# Altium PCB Arduino_Pro_Micro_PCB.PcbDoc
Units mil, origin at the board's own origin, x right, y up, seen from the top; angles counter-clockwise.
Board outline 1181.1 x 1574.8 mil, 2 copper layers (Top Layer, Bottom Layer); 19 components, 30 nets, 108 pads, 24 vias.
Unrouted connection lines stored in the file: 1.
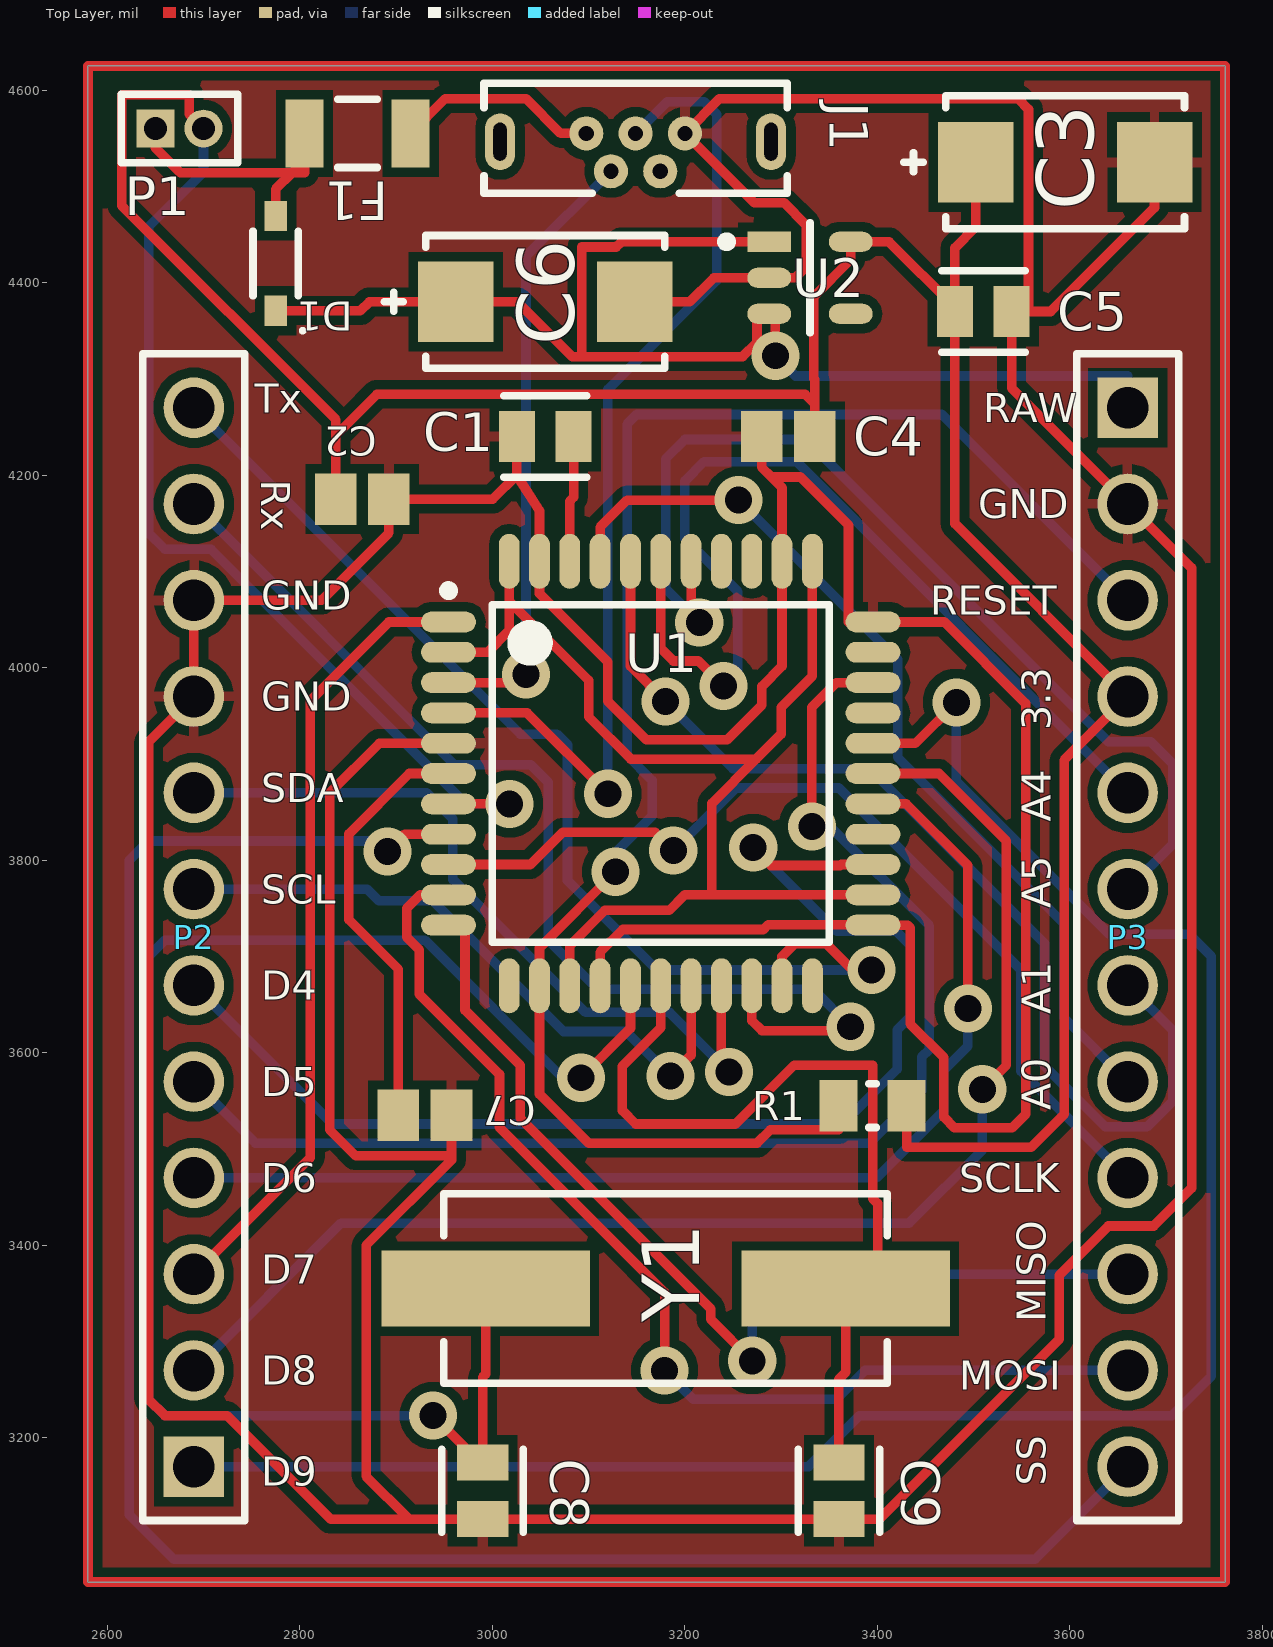
[diagram p0: Top Layer view]
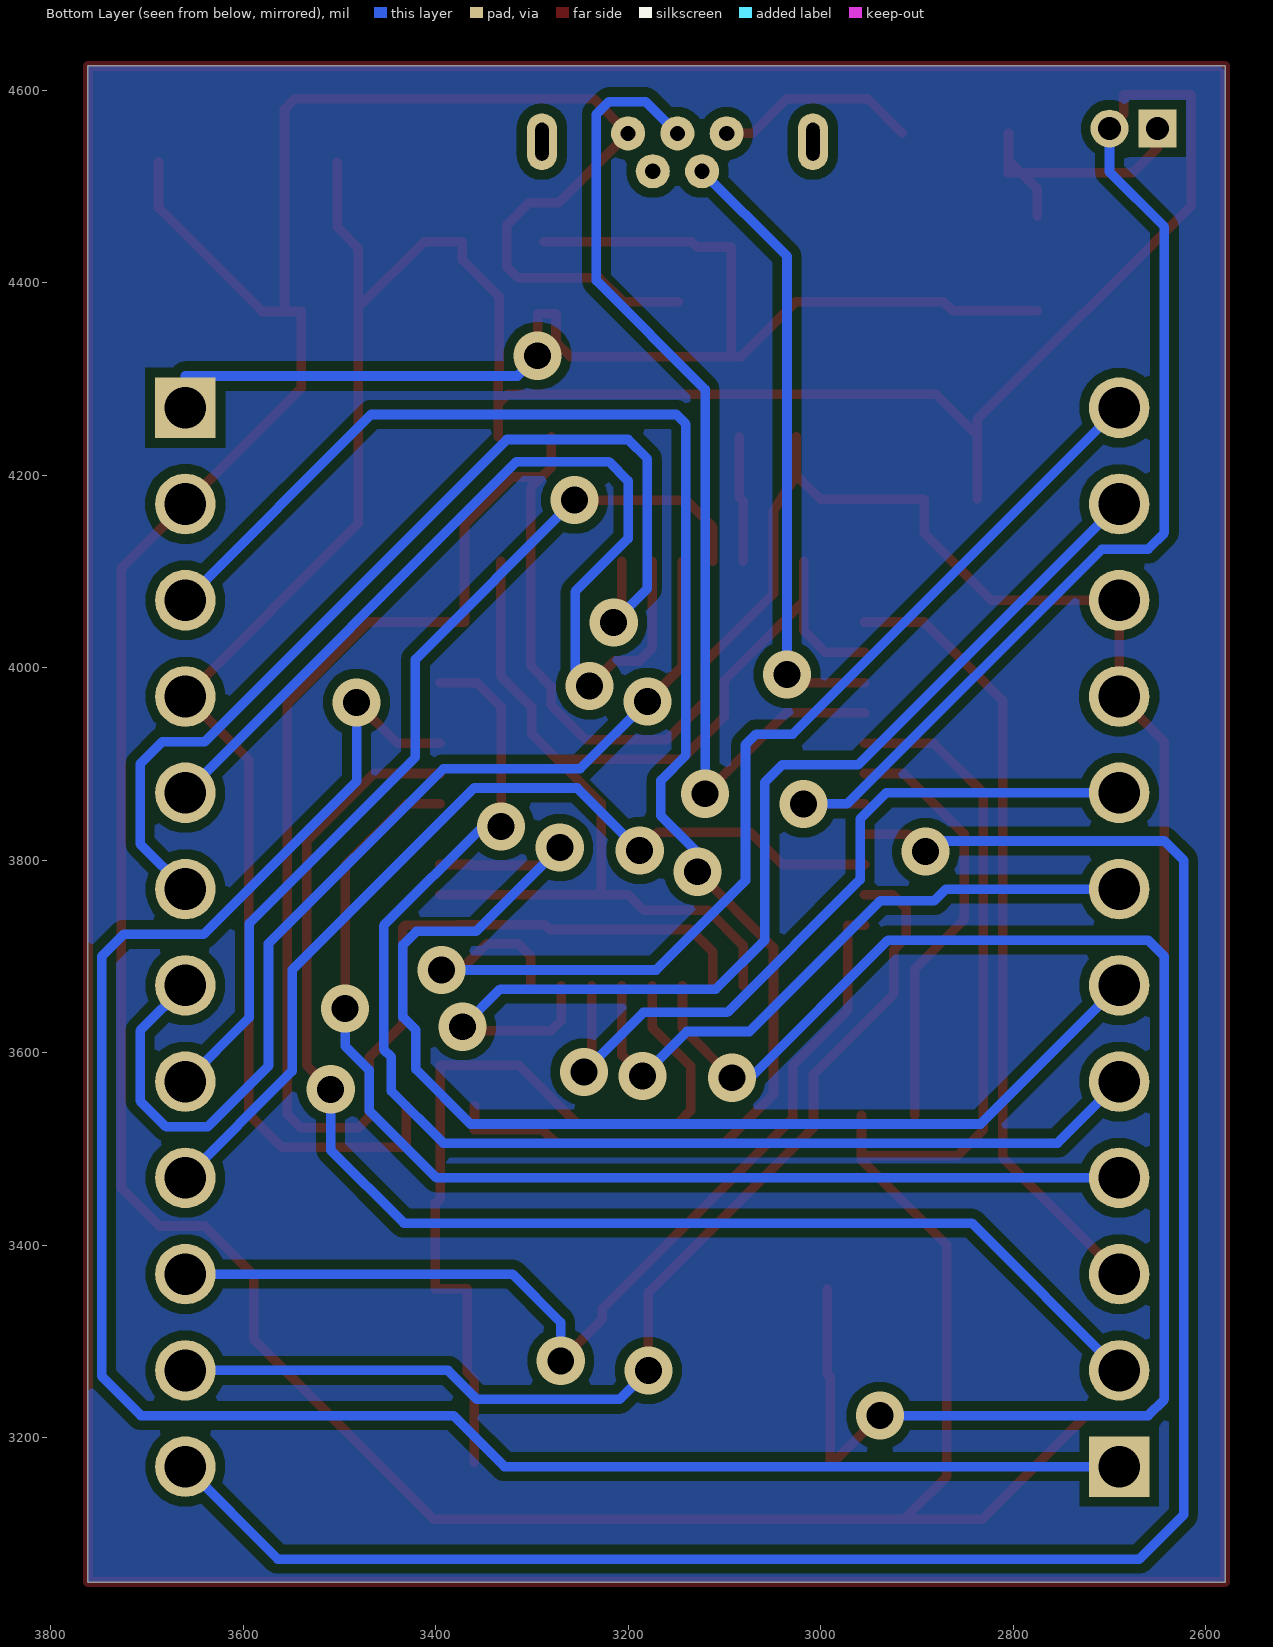
[diagram p1: Bottom Layer view, seen from below]
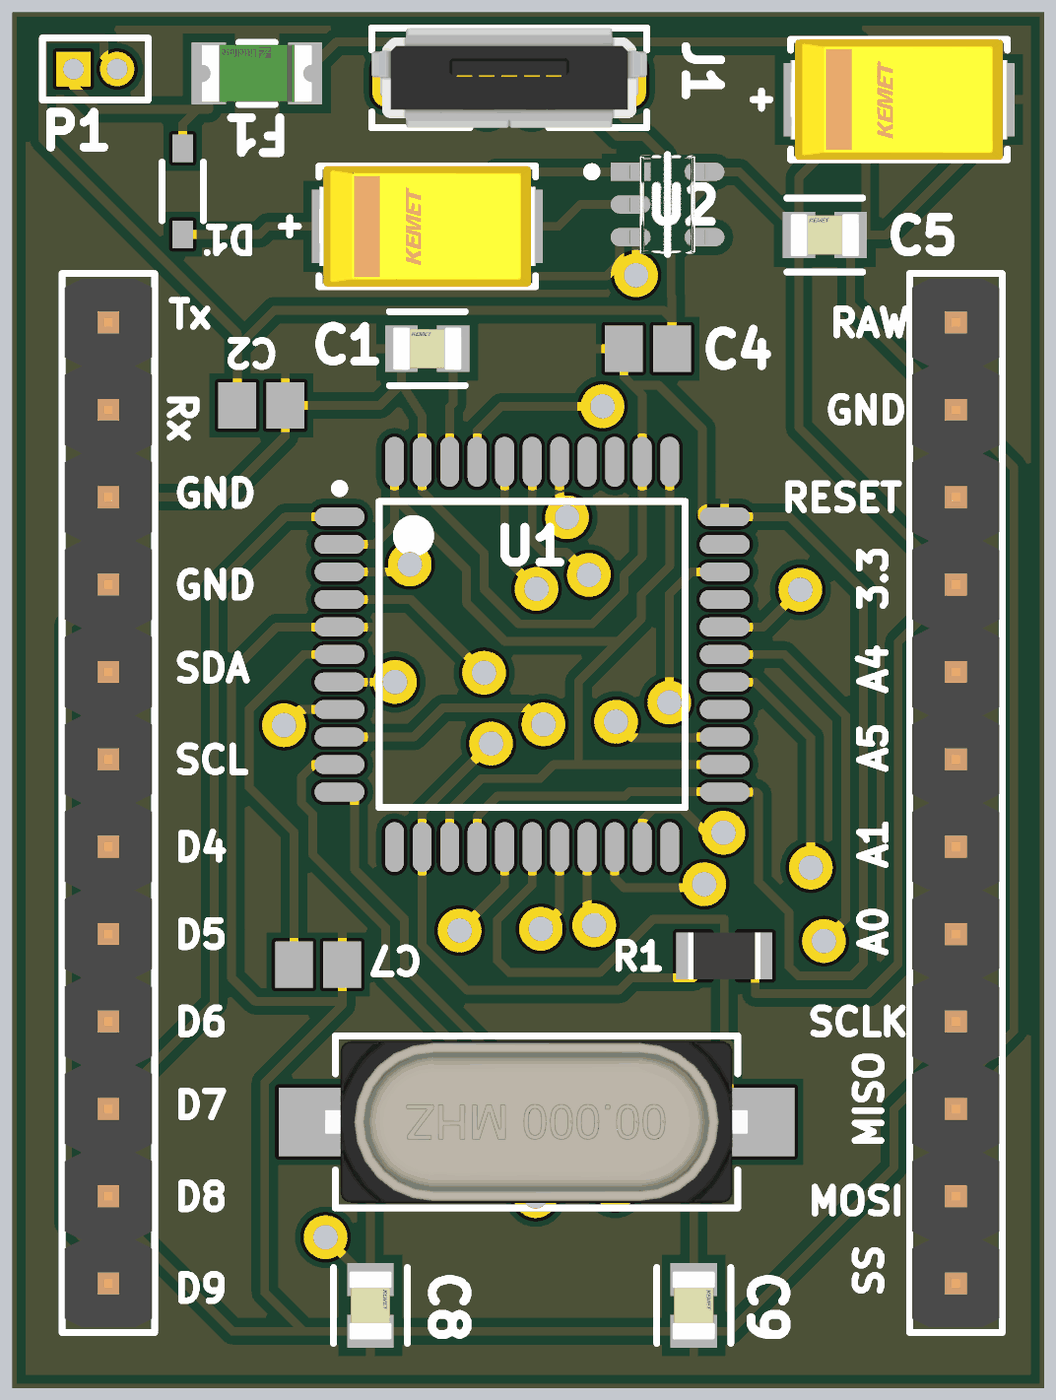
[diagram p2: 3D render of the assembled board from above, using the file's embedded part models]

## Layer stack, top to bottom
Top Solder: solder mask 0.4, Solder Resist, Dk 3.5
Top Layer: signal copper 1.4
Dielectric 1: dielectric 12.6, FR-4, Dk 4.8
Bottom Layer: signal copper 1.4
Bottom Solder: solder mask 0.4, Solder Resist, Dk 3.5

## Board outline
2580,3050.2 2580,4625 3761.1,4625 3761.1,3050.2

## Design rules (kind name [scope] priority, off if disabled: settings)
Clearance [All] p1: gap=10 ignorepadtopadclearanceinfootprint=FALSE except(0: Arc-Hole Track-Hole SMDPad-Hole THPad-Hole Via-Hole Fill-Hole Poly-Hole Region-Hole Text-Hole)
PolygonConnect [All] p1: connectstyle=Relief reliefconductorwidth=10 reliefentries=4 polygonreliefangle="90 Angle" airgapwidth=10
RoomDefinition Arduino_Pro_Micro_SCH [InComponentClass('Arduino_Pro_Micro_SCH')] p1: confinementstyle=ConfineIn formatcopy=TRUE lockcomponents=FALSE outline 7130,1080 10685,1080 10685,2205 7130,2205
RoutingVias [All] p1: holewidth=28 width=50 viastyle="Through Hole" minholewidth=28 minwidth=50 maxholewidth=28 maxwidth=50
SolderMaskExpansion [All] p1: expansion=4 istentingtop=FALSE
Width [All] p1: maxlimit=10 minlimit=10 preferedwidth=10
30 further rules are at their usual default settings.

## Components (designator, comment, footprint, x,y, rotation, side; value= is the part's Value field where it differs from the comment)
C1 "0.1uF 16V" FP-C0805C-DN-MFG 3055,4240 r0 top value="0.10 μF"
C2 "1uF 16V" CAPC2013X145X50LL20T25 2865,4175 r180 top
C3 "10uF 16V" FP-T491C106K016AT-MFG 3595,4525 r180 top
C4 "1uF 16V" CAPC2013X145X50LL20T25 3307.43,4240 r0 top
C5 "0.1uF 16V" FP-C0805C-DN-MFG 3510,4370 r0 top value="0.10 μF"
C6 "10uF 16V" FP-T491C106K016AT-MFG 3055,4380 r180 top
C7 "1uF 16V" CAPC2013X145X50LL20T25 2930,3535 r180 top
C8 "22pF" FP-C0805C-DN-MFG 2990,3145 r270 top value="22 pF"
C9 "22pF" FP-C0805C-DN-MFG 3360,3145 r270 top value="22 pF"
D1 "BAT165" INF-SOD323_V 2775,4420 r180 top
F1 "6V 500mA" FP-1206L050YR-MFG 2860,4555 r180 top
J1 "614105150621" 614105150621 3148.82,4546.34 r0 top
P1 "MHDR1X2" MHDR1X2 2650,4560 r0 top
P2 "61301211121" 61301211121 2690,3720 r90 top
P3 "61301211121" 61301211121 3660,3720 r270 top
R1 "10K" RESC2013X60X35NL10T20 3395,3545 r0 top
U1 "ATmega32U4-AU" 44ML_L 3175,3890 r0 top
U2 "MIC5219" FP-SOT23-5LD-PL-1-IPC_C 3330,4405 r0 top
Y1 "16Mhz" FOX-HC49SDLF_V 3180,3355 r180 top

## Footprints (in the part's own frame and the unit in brackets; to place one, negate y for a bottom-side part, rotate by r counter-clockwise, add the part's x,y. Pads: shape width x height; smd on the part's side, far side on the other; paste and mask are expansions set on the pad)
44ML_L [mm] "Thin QFP, 44-Leads, Body 10x10mm, Pitch 0.8mm, IPC High Density"
  oval 1.45x0.55 smd: 1(-5.6,4) 2(-5.6,3.2) 3(-5.6,2.4) 4(-5.6,1.6) 5(-5.6,0.8) 6(-5.6,0) 7(-5.6,-0.8) 8(-5.6,-1.6) 9(-5.6,-2.4) 10(-5.6,-3.2) 11(-5.6,-4) 23(5.6,-4) 24(5.6,-3.2) 25(5.6,-2.4) 26(5.6,-1.6) 27(5.6,-0.8) 28(5.6,0) 29(5.6,0.8) 30(5.6,1.6) 31(5.6,2.4) 32(5.6,3.2) 33(5.6,4)
  oval 0.55x1.45 smd: 12(-4,-5.6) 13(-3.2,-5.6) 14(-2.4,-5.6) 15(-1.6,-5.6) 16(-0.8,-5.6) 17(0,-5.6) 18(0.8,-5.6) 19(1.6,-5.6) 20(2.4,-5.6) 21(3.2,-5.6) 22(4,-5.6) 34(4,5.6) 35(3.2,5.6) 36(2.4,5.6) 37(1.6,5.6) 38(0.8,5.6) 39(0,5.6) 40(-0.8,5.6) 41(-1.6,5.6) 42(-2.4,5.6) 43(-3.2,5.6) 44(-4,5.6)
  silkscreen extent -5.72,-4.45 4.45,4.95, body extent -5,-5 5,5, height 1.2
61301211121 [mm] "Pin Header, pitch 2.54 mm, THT, Vertical, single row, 12p"
  rect 1.6x1.6 hole 1.1: 1(-13.97,0)
  round 1.6 hole 1.1: 2(-11.43,0) 3(-8.89,0) 4(-6.35,0) 5(-3.81,0) 6(-1.27,0) 7(1.27,0) 8(3.81,0) 9(6.35,0) 10(8.89,0) 11(11.43,0) 12(13.97,0)
  silkscreen extent -15.39,-1.34 15.39,1.34, body extent -15.24,-1.27 15.24,1.27, height 8.57
614105150621 [mm] "Micro USB 2.0 Type AB Vertical 5 Contacts"
  round 0.9 hole 0.4: 1(-1.3,0.22) 2(-0.65,-0.78) 3(0,0.22) 4(0.65,-0.78) 5(1.3,0.22)
  oval 0.8x1.5 hole 0.35 slot 1 at 90 deg: Shell(-3.575,0) Shell(3.575,0)
  silkscreen extent -4,-1.36 4,1.54, body extent -4,-1.36 4,1.54, height 5.66
CAPC2013X145X50LL20T25 [mm] "Chip Capacitor, 2-Leads, Body 2.00x1.25mm, IPC High Density"
  rect 1.1x1.35 smd: 1(-0.7,0) 2(0.7,0)
  body extent -1.1,-0.72 1.1,0.72, height 1.45
FOX-HC49SDLF_V [mm] "SMD, 2-Leads, Body 5x11.7mm"
  rect 5.5x2 smd: 1(-4.75,0) 2(4.75,0)
  silkscreen extent -5.85,-2.5 5.85,2.5, body extent -6.15,-2.35 6.15,2.35, height 4.34
FP-1206L050YR-MFG [mm]
  rect 1x1.8 smd paste+0 mask+0: 1(-1.4,0) 2(1.4,0)
  silkscreen extent -0.53,-0.9 0.53,0.9, body extent -2,-1 2,1, height 0.25
FP-C0805C-DN-MFG [mm]
  rect 0.95x1.35 smd paste+0 mask+0: 1(-0.75,0) 2(0.75,0)
  silkscreen extent -1.1,-1.07 1.1,1.07, body extent -1.4,-0.85 1.4,0.85, height 0.25
FP-SOT23-5LD-PL-1-IPC_C [mm]
  rect 1.156x0.53 smd paste+0 mask+0: 1(-1.075,0.95)
  rrect100% 1.156x0.53 smd paste+0 mask+0: 2(-1.075,0) 3(-1.075,-0.95) 4(1.075,-0.95) 5(1.075,0.95)
  silkscreen extent -2.33,-1.45 0,1.45, body extent -1.75,-1.55 1.75,1.55, height 0.25
FP-T491C106K016AT-MFG [mm]
  rect 1.99x2.13 smd paste+0 mask+0: 1(-2.36,0) 2(2.36,0)
  silkscreen extent -3.15,-1.75 4.25,1.75, body extent -3.48,-1.87 3.48,1.87, height 0.25
INF-SOD323_V [mm] "SOD, 2-Leads, Body 1.7x1.25 mm"
  rect 0.6x0.8 smd: 1(0,1.25) 2(0,-1.25)
  silkscreen extent -0.76,-0.85 0.6,1.83, body extent -0.63,-0.85 0.63,0.85, height 1.1
MHDR1X2 [mm] "Connector; Header; 2 Position"
  rect 1x1 hole 0.6: 1(0,0)
  round 1 hole 0.6: 2(1.27,0)
  silkscreen extent -0.9,-0.9 2.17,0.9
RESC2013X60X35NL10T20 [mm] "Chip Resistor, 2-Leads, Body 2.1x1.35mm, IPC Medium Density"
  rect 1x1.35 smd: 1(-0.9,0) 2(0.9,0)
  silkscreen extent -0.1,-0.58 0.1,0.58, body extent -1.05,-0.68 1.05,0.67, height 0.6

## Part data
C1 C5: library part CMP-2007-00274-2, "CAP CER 0.1UF 16V X7R 0805", Capacitance="0.10 μF", Manufacturer=KEMET, Manufacturer Part Number=C0805C104K4RACTU, Package=C0805C-DN, Temperature="-55°C to +125°C", Temperature Characteristic=X7R, Temperature Coefficient=30ppm/°C, Temperature Range High=+125°C, Temperature Range Low=-55°C, Tolerance=0.1, Voltage Rating="16 V", Automotive=No, Category=Cap, ComponentLink2Description=Datasheet, ComponentLink2URL=https://content.kemet.com/datasheets/KEM_C1003_C0G_SMD.pdf, Device Class L1="Passive Components", Device Class L2=Capacitors, Device Class L3="Ceramic Capacitors", Digikey Description="CAP CER 0.1UF 16V X7R 0805", Height=0.88mm, Ipc Land Pattern Name=CAPC200125X78, Lead Free=Yes, Material=Ceramic, Mouser Description="Multilayer Ceramic Capacitors MLCC - SMD/SMT 16volts 0.1uF X7R 10%", Octopart=https://octopart.com/c0805c104k4ractu-kemet-92155, RoHS=TRUE
C2 C4 C7: library part CMP-1036-04746-2, Manufacturer=Kemet, Part Number=C0805C105K4PACTU
C3 C6: library part CMP-2000-07197-3, "CAP TANT 10UF 10% 16V 2312", Capacitance=10uF, Case Code (Imperial)=2312, Case Code (Metric)=6032, Case/Package=Molded, Dielectric Material=Tantalum, ESR (Equivalent Series Resistance)=1.8R, Leakage Current=1.6uA, Max Operating Temperature=125°C, Min Operating Temperature=-55°C, Package Quantity=1, Ripple Current=247mA, Tolerance=10%, Voltage=16V, Depth=3.2mm, Dissipation Factor=6%, Features="General Purpose", Height=2.5mm, Height - Seated (Max)=0.11inch, Lead Free="Lead Free", Length=6mm, Life (Hours)=2000Hour, Mount="Surface Mount", Packaging="Tape and Reel", Polarity=Polar, Radiation Hardening=No, REACH SVHC="No SVHC", RoHS Compliant=Yes, Termination=SMD/SMT, Voltage Rating=16V, Voltage Rating (DC)=16V, Width=3.2mm
C8 C9: library part CMP-2007-00048-2, "Capacitor; Ceramic; Cap; 22.0pF; Tol 5%; SMT; Vol-Rtg 50V; C0G; Tape and Reel", Capacitance="22 pF", Manufacturer=KEMET, Manufacturer Part Number=C0805C220J5GACTU, Package=C0805C-DN, Temperature="-55°C to +125°C", Temperature Characteristic=C0G, Temperature Coefficient=30ppm/°C, Temperature Range High=+125°C, Temperature Range Low=-55°C, Tolerance=0.05, Voltage Rating="50 V", Automotive=No, Category=Cap, ComponentLink2Description=Datasheet, ComponentLink2URL=https://content.kemet.com/datasheets/KEM_C1003_C0G_SMD.pdf, Device Class L1="Passive Components", Device Class L2=Capacitors, Device Class L3="Ceramic Capacitors", Digikey Description="Capacitor; Ceramic; Cap; 22.0pF; Tol 5%; SMT; Vol-Rtg 50V; C0G; Tape and Reel", Height=0.88mm, Ipc Land Pattern Name=CAPC200125X78, Lead Free=Yes, Material=Ceramic, Mouser Description="Multilayer Ceramic Capacitors MLCC - SMD/SMT 50volts 22pF C0G 5%", Octopart=https://octopart.com/c0805c220j5gactu-kemet-145470, RoHS=TRUE
D1: library part CMP-1183-00004-1, "Medium Power AF Schottky Diode, SOD323, Reel, Green", Manufacturer=Infineon, ComponentLink1Description="Manufacturer URL", ComponentLink1URL=http://www.infineon.com/, ComponentLink2Description=Datasheet, ComponentLink2URL=http://www.infineon.com/dgdl/bat165series.pdf?folderId=db3a304313d846880113def5812204a1&fileId=db3a304313d846880113df01f69804d6, ComponentLink3Description="Package Specification", ComponentLink3URL=http://www.infineon.com/dgdl/SOD323-Package_Overview.pdf?folderId=db3a30431936bc4b011952aab84f3bbe&fileId=db3a30431936bc4b011952beed653be3, Configuration=Single, CT (max)="12Â pF", Green=TRUE, IF (max)="750Â mA", Mounting Technology="Surface Mount", PackageDescription="2-Pin Small Outline Diode Package, 1.25 x 1.7 mm Body", PackageReference=SOD323, Packing=Reel, PartNumber=BAT165, VF (max)="700Â mV", VR (max)="40Â V"
F1: library part CMP-08606-000073-1, "PTC RESET FUSE 6V 500MA 1206", Case Code (Imperial)=1206, Case Code (Metric)=3216, Current Rating=100A, Hold Current=500mA, Max Operating Temperature=85°C, Max Power Dissipation=600mW, Max Voltage Rating (DC)=6V, Min Operating Temperature=-40°C, Package Quantity=4000, Resistance=700mR, Trip Current=1A, Approvals=cULus, Case/Package=1206, Height=0.75mm, Lead Free="Lead Free", Length=3.4mm, Max Current Rating=100A, Operating Supply Voltage=6V, Packaging="Tape and Reel", Power Dissipation=600mW, REACH SVHC="No SVHC", RoHS Compliant=Yes, Series=1206L, Terminal Material=Copper, Termination=SMD/SMT, Time to Trip=0.1s, Voltage Rating=6V, Voltage Rating (DC)=6V, Width=1.8mm, Working Voltage=6V
J1: library part CMP-1502-03251-1, "Micro USB 2.0 Type AB Receptacle WR-COM, Vertical, THT", Contact Resistance=30mOhm, Manufacturer="Wurth Elektronik", Operating Temperature=-40to85degC, Rated Current=1.8A, Working Voltage=30VAC, Connector Type=MicroUSB2.0TypeAB, Datasheet URL=https://katalog.we-online.de/em/datasheet/614105150621.pdf, Gender=Receptacle, Manufacturer URL=http://www.we-online.de, Mounting Technology=THT, Orientation=Vertical, Package Reference=614105150621, Packaging=TapeandReel, Part Number=614105150621, Publisher=WurthElektronik
P1: "Header, 2-Pin", LatestRevisionDate=17-Jul-2002, LatestRevisionNote="Re-released for DXP Platform.", Publisher="Altium Limited"
P2 P3: library part CMP-1502-01086-1, "THT Vertical Pin Header WR-PHD, Pitch 2.54 mm, Single Row, 12 pins", Contact Resistance=20mOhm, Manufacturer="Wurth Elektronik", Operating Temperature=-40to105degC, Rated Current=3A, Withstanding Voltage=500VAC, Working Voltage=250VAC, Datasheet URL=https://katalog.we-online.de/em/datasheet/6130xx11121.pdf, Gender=Male, Manufacturer URL=http://www.we-online.de, Mounting Technology=THT, Orientation=Vertical, Package Reference=61301211121, Packaging=Bag, Part Number=61301211121, Pin Number=12, Pitch=2.54mm, Publisher=WurthElektronik, Row Number=Single
R1: library part CMP-1659-00013-4, "Chip Resistor, 10 KOhm, +/- 1%, 0.125 W, -55 to 155 degC, 0805 (2012 Metric), RoHS, Tape and Reel", Manufacturer=Yageo, Max Operating Temperature="155 degC", Min Operating Temperature="-55 degC", Package Quantity=5000, Voltage Rating="150 V", ComponentLink1Description="Manufacturer URL", ComponentLink1URL=http://www.yageo.com/, ComponentLink2Description=Datasheet, ComponentLink2URL=http://www.yageo.com/documents/recent/PYu-RC_Group_51_RoHS_L_04.pdf, DatasheetVersion="Rev. 4, 02/2016", Height="0.5 mm", Length="2 mm", Mount="Surface Mount", Mounting Technology="Surface Mount", PackageDescription="2-Pin Surface Mounted Device, Body 2 x 1.25 mm", PackageReference=0805, Packaging="Tape and Reel", Pins=2, REACH SVHC="No SVHC", RoHSCompliant=true
U1: library part CMP-0095-00285-2, "8-bit AVR Microcontroller, 2.7-5.5V, 16MHz, 32KB Flash, 1KB EEPROM, 2.5KB SRAM, USB Controller, 44-pin TQFP, Industrial Grade (-40°C to 85°C), Ext Osc", ComponentLink1Description="Manufacturer URL", ComponentLink1URL=http://www.atmel.com/, ComponentLink2Description="ATmega16U4/32U4 Datasheet", ComponentLink2URL=http://www.atmel.com/dyn/resources/prod_documents/doc7766.pdf, ComponentLink3Description="ATmega16U4 ATmega32U4 Summary", ComponentLink3URL=http://www.atmel.com/dyn/resources/prod_documents/7766S.pdf, DatasheetVersion="revF, Nov-2010", PackageDescription="44-Pin Plastic Thin Quad Flat Pack, 10 x 10 x 1.0 mm Body, 0.8 mm Pitch (TQFP)", PackageReference=44ML, PackageVersion="rev.G, Jul-2007", RevisionNote="DatasheetVersion updated. URLs added."
U2: library part CMP-06324-000027-1, "IC REG LINEAR 3.3V 500MA SOT23-5", Case/Package=SOT-23-5, Dropout Voltage=350mV, Max Input Voltage=12V, Max Operating Temperature=125°C, Min Input Voltage=2.5V, Min Operating Temperature=-40°C, Nominal Output Voltage=3.3V, Output Current=500mA, Lead Free="Lead Free", Mount="Surface Mount", Number of Pins=5, Number of Regulators=1, Output Type=Fixed, Output Voltage=3.3V, Packaging="Cut Tape", REACH SVHC="No SVHC"
Y1: library part CMP-2100-03639-1, "Resistance Weld Crystal, 8 MHz, +/- 30 ppm, -20 to 70 degC, 2-Pin SMD, RoHS, Tape and Reel", Case/Package=SMD/SMT, ESR (Equivalent Series Resistance)=80Ohm, Frequency=8MHz, Frequency Stability=50ppm, Frequency Tolerance=30ppm, Load Capacitance=20pF, Manufacturer="FOX Electronics", Max Operating Temperature=70degC, Min Operating Temperature=-20degC, Package Description="2-Pin Surface Mount Device, Body 5 x 11.7 mm", Package Quantity=1000, Package Reference=HC49SDLF, Datasheet URL=http://www.foxonline.com/pdfs/hc49sdlf.pdf, Datasheet Version=42064.0, Depth=5mm, Height=4.5mm, Lead Free=LeadFree, Length=11.7mm, Manufacturer URL=http://www.foxonline.com/, Mount=SurfaceMount, Number of Pins=2, Packaging=TapeandReel, Radiation Hardening=No, REACH SVHC=NoSVHC, RoHSCompliant=True, Series Resistance=80Ohm, Termination=SMD/SMT, Tolerance=50ppm, Width=5mm

## Via types
v1: diameter 50, hole 28, Top Layer to Bottom Layer, 24 vias

## Nets (pads, with @x,y where several pads share a name; then routed paths per layer and width w, separated by ;. In a path a pad name is that pad's centre, name@x,y a point inside that pad or via, vN(x,y) a via of type N, cw(c..) or ccw(c..) an arc to the next point about the centre after c; other vN are vias at no path point)
+3.3V: C2.2 C3.2 C4.2 C5.1 P1.2 P3.4 R1.2 U1.2 U1.7 U1.14 U1.24 U1.34 U1.44 U2.5 | length 5076.3
  Top Layer w10: P1.2 2685,4575 2685,4595 2615,4595 2615,4480 2837.44,4257.56 2837.44,4241.44 ; C2.2 2837.44,4241.44 ; U1.7 v1(3018,3858.5) ; U1.2 2995,4015.98 3017.52,4038.5 3017.52,4069.41 ; U1.44 3017.52,4069.41 ; U1.14 3080.51,3711.51 3117,3748 3183.84,3748 3199.86,3764.02 3228,3764.02 ; U1.34 3332.48,3991.32 3300,3958.84 3300,3931 3274,3905 ; C4.2 3334.99,4274 ; U1.24 3228,3764.02 ; R1.2 3430.43,3502 3560,3502 3594,3536 3594,3904 P3.4 3480.47,4149.53 C5.1 C5.1@3480.47,4374 ; C3.2 3502.09,4457.61 3480.47,4436 C5.1@3480.47,4374 ; 2837.44,4241.44 2880,4284 3324.99,4284 3334.99,4274 ; 3017.52,4069.41 3100,3986.93 3100,3949 3144,3905 3274,3905 ; 3228,3764.02 3228,3859 3274,3905 ; 3334.99,4274 3334.99,4299.31 3334,4300.29 3334,4385.67 3372.33,4424 U2.5 3412.07,4442.4 C5.1@3480.47,4374
  Bottom Layer w10: P1.2 2700,4515 2643,4458 2643,4140 2660,4123 2708,4123 2972.5,3858.5 v1(3018,3858.5)
A0: P3.8 U1.41 | length 962.2
  Top Layer w10: U1.41 3112.01,4146.01 3140,4174 v1(3255.6,4174)
  Bottom Layer w10: v1(3255.6,4174) 3421.07,4008.53 3421.07,3906.96 3593.6,3734.44 3593.6,3636.4 P3.8
A1: P3.7 U1.40 | length 1095.7
  Top Layer w10: U1.40 3143.5,4001.5 v1(3180,3965)
  Bottom Layer w10: v1(3180,3965) 3250,3895 3392,3895 3573.6,3713.4 3573.6,3586.4 3637,3523 3680,3523 3707,3550 3707,3623 P3.7
A4: P3.5 U1.39 | length 1024.4
  Top Layer w10: U1.39 3175,4020 3188.07,4006.93 3214.07,4006.93 v1(3240,3981)
  Bottom Layer w10: v1(3240,3981) 3255,3996 3255,4079 3200,4134 3200,4194 3220,4214 3316,4214 P3.5
A5: P3.6 U1.38 | length 1075.8
  Top Layer w10: U1.38 3206.5,4055.5 v1(3215,4047)
  Bottom Layer w10: v1(3215,4047) 3180,4082 3180,4217 3200,4237 3326,4237 3640,3923 3684,3923 3707,3900 3707,3817 P3.6
D4: P2.6 U1.25 | length 1285.9
  Top Layer w10: v1(3271,3813) 3289.54,3794.46 3361.37,3794.46 3362.43,3795.51 U1.25
  Bottom Layer w10: P2.6 2834,3526 3363.73,3526 3420.58,3582.85 3420.58,3623.58 3434,3637 3434,3712 3420,3726 3358,3726 v1(3271,3813)
D5: P2.5 U1.31 | length 1342.9
  Top Layer w10: v1(3332,3835) 3332,3959 3357.49,3984.49 U1.31
  Bottom Layer w10: P2.5 2754,3506 3392.03,3506 3446.03,3560 3446.03,3595.61 3454,3603.58 3454,3732 3351,3835 v1(3332,3835)
D6: P2.4 U1.27 | length 1197.9
  Top Layer w10: U1.27 3430,3858.5 3494,3794.5 v1(3494,3646)
  Bottom Layer w10: P2.4 3399,3470 3469,3540 3469,3582 3494,3607 v1(3494,3646)
D7: P2.3 U1.1 | length 823.4
  Top Layer w10: P2.3 2810.98,3490.98 2810.98,3965.98 2892.48,4047.48 U1.1
D8: P2.2 U1.28 | length 1412.7
  Top Layer w10: U1.28 3464,3890 3534,3820 3534,3587 v1(3509,3562)
  Bottom Layer w10: P2.2 2843,3423 3433,3423 3509,3499 v1(3509,3562)
D9: P2.1 U1.29 | length 2058.5
  Top Layer w10: U1.29 3439.5,3921.5 v1(3482,3964)
  Bottom Layer w10: P2.1 3328.44,3170 3381.44,3223 3706,3223 3747,3264 3747,3700 3724,3723 3640.89,3723 3482,3881.89 v1(3482,3964)
D+: J1.3 U1.4 | length 1056.3
  Top Layer w10: U1.4 3036.01,3952.99 v1(3120,3869)
  Bottom Layer w10: v1(3120,3869) 3120,4289 3233,4402 3233,4575 3220,4588 3181.82,4588 J1.3
D-: J1.2 U1.3 | length 643.2
  Top Layer w10: U1.3 3026.49,3984.49 v1(3035,3993)
  Bottom Layer w10: v1(3035,3993) 3035,4427.4 J1.2
GND: C1.1 C2.1 C3.1 C4.1 C5.2 C6.1 C7.1 C8.2 C9.2 J1.5 P2.9 P2.10 P3.2 U1.5 U1.15 U1.23 U1.33 U1.35 U1.43 U2.2 | length 8223.1
  Top Layer w10: U1.5 2882.64,3921.5 2830.98,3869.84 2830.98,3520 2857.98,3493 2957.56,3493 ; C7.1 2957.56,3493 ; C1.1 3025.47,4200 ; U1.15 3112.01,3704.53 3135.48,3728 3281.58,3728 3286.65,3733.07 3377.2,3733.07 3377.76,3732.52 U1.23 3431.48,3732.52 3434,3730 3434,3630 3469,3595 3469,3533 3480,3522 3540,3522 3554,3536 3554,3963 3469.52,4047.48 U1.33 3370,4047.48 3370,4148 3320,4198 3290,4198 ; C6.1 3205,4380 3230,4405 U2.2 3314.58,4405 3326,4416.42 3326,4460 3303,4483 3272,4483 J1.5 3236,4591 3546,4591 3557,4580 C5.2@3557,4370 ; C4.1 3279.87,4208.13 3290,4198 ; C3.1 3687.91,4477.91 3580,4370 C5.2@3557,4370 ; 2913.53,3115.47 C8.2 C9.2 3402,3115.47 3589,3302.47 3589,3369 3640,3420 3687,3420 3726.5,3459.5 3726.5,4103.5 P3.2 3539.53,4290.47 C5.2 C5.2@3557,4370 ; 2913.53,3115.47 2832,3115.47 2724.47,3223 2660,3223 2643,3240 2643,3923 P2.9 P2.10 2822.56,4070 2892.56,4140 C2.1 3000.47,4175 3025.47,4200 ; 2913.53,3115.47 2869,3160 2869,3400 2957.56,3488.56 2957.56,3493 ; 3025.47,4200 3049.02,4163 U1.43 3049.02,4076.98 3120,4006 3120,3965 3160,3925 3244,3925 3280,3961 3280,3980.61 3300.98,4001.59 U1.35 3300.98,4187.02 3290,4198
MISO: P3.10 U1.11 | length 1044
  Top Layer w10: U1.11 2971.69,3732.52 2971.69,3644.31 3028.86,3587.14 3028.86,3532.14 3227,3334 3227,3323 v1(3270,3280)
  Bottom Layer w10: v1(3270,3280) 3270,3320 3320,3370 P3.10
MOSI: P3.11 U1.10 | length 1146.2
  Top Layer w10: U1.10 2925,3764.02 2910.98,3750 2910.98,3720.02 2924,3707 2924,3661 3007.51,3577.49 3007.51,3522.49 3179,3351 v1(3179,3270)
  Bottom Layer w10: v1(3179,3270) 3209,3240 3357,3240 3387,3270 P3.11
NetC1_2: C1.2 U1.42 | length 131.2
  Top Layer w10: U1.42 3080.51,4173 3084.53,4177.02 C1.2
NetC7_2: C7.2 U1.6 | length 443.1
  Top Layer w10: C7.2 2902.44,3686.69 2850.98,3738.15 2850.98,3827.26 2913.72,3890 U1.6
NetC8_1: C8.1 U1.16 Y1.2 | length 1648
  Top Layer w10: v1(2938.53,3223) 2987,3174.53 C8.1 2990,3263 2992.99,3265.99 Y1.2 ; v1(3092,3574) 3143.5,3625.5 U1.16
  Bottom Layer w10: v1(2938.53,3223) 2660,3223 2643,3240 2643,3700 2660,3717 2930,3717 3073,3574 v1(3092,3574)
NetC9_1: C9.1 U1.17 Y1.1 | length 887.9
  Top Layer w10: U1.17 3175,3626 3135,3586 3135,3540 3149,3526 3252.5,3526 3313.5,3587 3395,3587 3395,3448.59 3400.21,3443.38 3400.21,3355 Y1.1 3367.01,3268.01 3360,3261 C9.1
NetD1_2: D1.2 F1.2 P1.1 | length 296.7
  Top Layer w10: P1.1 2650,4540 2676,4514 2792,4514 ; D1.2 2775,4497 2792,4514 ; F1.2 F1.2@2804.88,4526.88 ; 2792,4514 F1.2@2804.88,4526.88 ; 2792,4514 2804.88,4514 F1.2@2804.88,4526.88
RAW: C6.2 D1.1 P3.1 U2.1 U2.3 | length 1344.4
  Top Layer w10: D1.1 2863,4370.79 2872.21,4380 C6.2 3026,4380 3083,4323 3093,4323 ; U2.1 3134,4442.4 3128.6,4437 3093,4437 3093,4323 ; v1(3294,4324) 3294,4367.6 U2.3 3275,4367.6 3275,4338 3260,4323 3093,4323
  Bottom Layer w10: v1(3294,4324) 3315,4303 3660,4303 P3.1
RESET: P3.3 R1.1 U1.13 | length 1721.8
  Top Layer w10: v1(3128,3788) 3049.02,3709.02 U1.13 3049.02,3556.98 3100,3506 3275,3506 3289,3520 3359.57,3520 R1.1
  Bottom Layer w10: v1(3128,3788) 3128,3808 3166,3846 3166,3883 3140,3909 3140,4253 3150,4263 3467,4263 P3.3
RXD1: P2.11 U1.20 | length 1147.5
  Top Layer w10: U1.20 3269.49,3633.51 3280,3623 3368,3623 v1(3372,3627)
  Bottom Layer w10: P2.11 2961,3899 3040,3899 3058,3881 3058,3717 3109,3666 3333,3666 v1(3372,3627)
SCL: P2.7 U1.18 | length 677.8
  Top Layer w10: v1(3185,3576) 3206.5,3597.5 U1.18
  Bottom Layer w10: P2.7 2869.96,3770 2882,3757.96 2938.04,3757.96 3074,3622 3139,3622 v1(3185,3576)
SCLK: P3.9 U1.9 | length 983.4
  Top Layer w10: U1.9 3039.51,3795.51 3073,3829 3169,3829 v1(3188,3810)
  Bottom Layer w10: v1(3188,3810) 3253,3875 3360,3875 3549,3686 3549,3581 P3.9
SDA: P2.8 U1.19 | length 805.9
  Top Layer w10: U1.19 3237.99,3588.01 v1(3246,3580)
  Bottom Layer w10: P2.8 2932,3870 2959.02,3842.98 2959.02,3779.98 3097,3642 3184,3642 v1(3246,3580)
SS: P3.12 U1.8 | length 2127.6
  Top Layer w10: v1(2891,3809) 2909.01,3827.01 U1.8
  Bottom Layer w10: v1(2891,3809) 2880,3820 2643,3820 2623,3800 2623,3120 2669,3074 3564,3074 P3.12
TXD1: P2.12 U1.21 | length 1168.7
  Top Layer w10: U1.21 3300.98,3700 3314.06,3713.07 3346.93,3713.07 3374,3686 v1(3394,3686)
  Bottom Layer w10: P2.12 3029,3931 3067.07,3931 3078.07,3920 3078.07,3778.9 3170.98,3686 v1(3394,3686)
UVCC: F1.1 J1.1 | length 212.3
  Top Layer w10: F1.1 2951.12,4591 3035,4591 3071,4555 J1.1
pads on no net: J1.4 J1.Shell U1.12 U1.22 U1.26 U1.30 U1.32 U1.36 U1.37 U2.4
copper on no net: | length 5511.8
  Top Layer w10: 2580,3050.2 3761.1,3050.2 3761.1,4625 2580,4625 2580,3050.2

## Polygon pours and split planes (outlines as drawn)
GND on Top Layer "GND_L01_P000" (solid, pour order 0): 2580,4625 3761.1,4625 3761.1,3050.2 2580,3050.2
no net on Bottom Layer "NONET_L02_P001" (solid, pour order 1): 2580,4625 3761.1,4625 3761.1,3050.2 2580,3050.2

## Silkscreen, mask and mechanical layers (free items; w line width, h text height)
Top Overlay:
  text "Tx" at 2753.4,4264.87 h30
  text "RAW" at 3510,4255 h30
  text "Rx" at 2760,4195 h30 r270
  text "GND" at 3505,4155 h30
  text "GND" at 2760,4060 h30
  text "RESET" at 3455,4055 h30
  text "GND" at 2760,3955 h30
  text "3.3" at 3580,3935 h30 r90
  text "SDA" at 2760,3860 h30
  text "A4" at 3580,3840 h30 r90
  text "SCL" at 2760,3755 h30
  text "A5" at 3580,3750 h30 r90
  text "D4" at 2760,3655 h30
  text "A1" at 3580,3640 h30 r90
  text "D5" at 2760,3555 h30
  text "A0" at 3580,3540 h30 r90
  text "D6" at 2760,3455 h30
  text "SCLK" at 3485,3455 h30
  text "D7" at 2760,3360 h30
  text "MISO" at 3575,3320 h30 r90
  text "D8" at 2760,3255 h30
  text "MOSI" at 3485,3250 h30
  text "D9" at 2760,3150 h30
  text "SS" at 3575,3150 h30 r90